# Altium PCB PCB1.PcbDoc
Units mm, origin at the board's own origin, x right, y up, seen from the top; angles counter-clockwise.
Board outline 49.91 x 61.09 mm, 2 copper layers (Top Layer, Bottom Layer); 27 components, 38 nets, 112 pads, 0 vias.
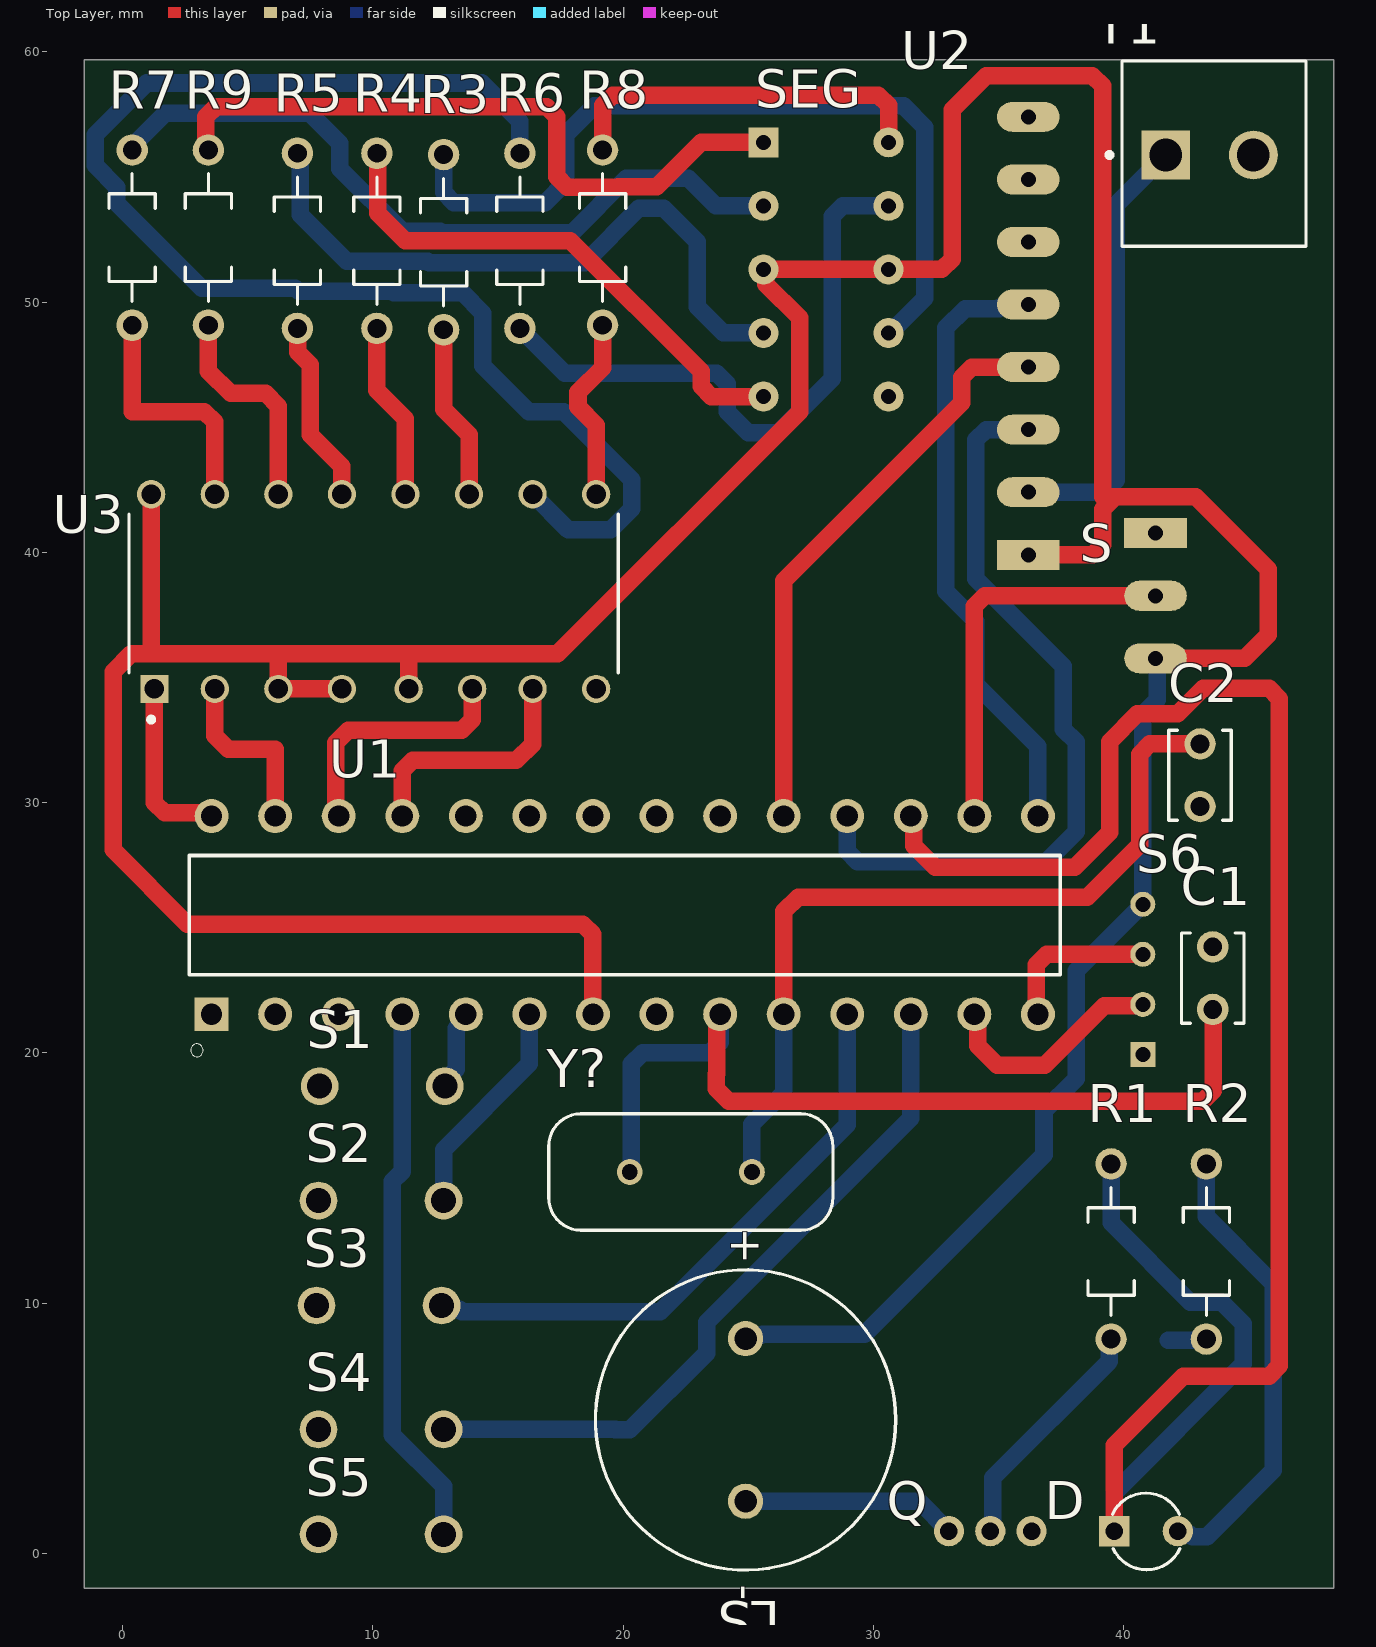
[diagram p0: Top Layer view]
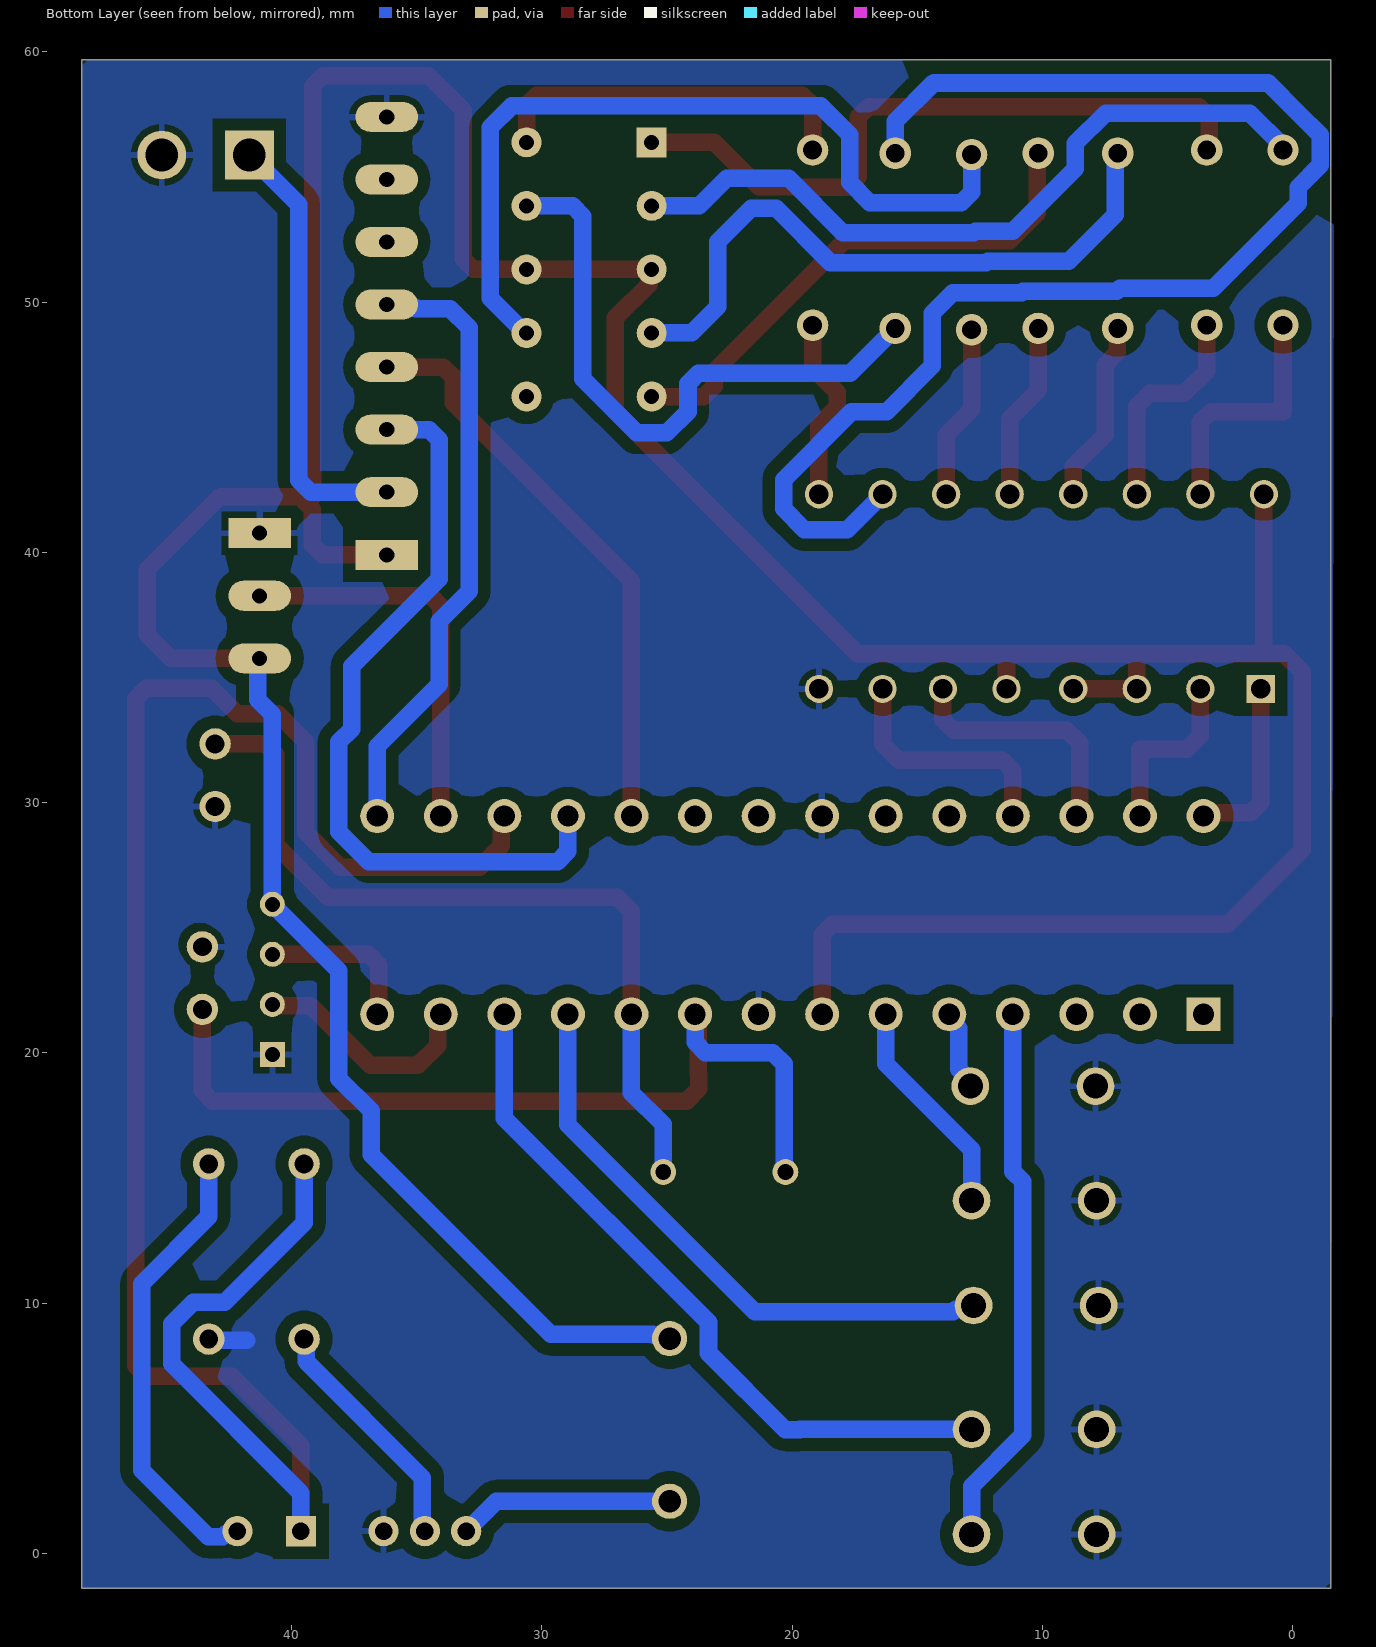
[diagram p1: Bottom Layer view, seen from below]
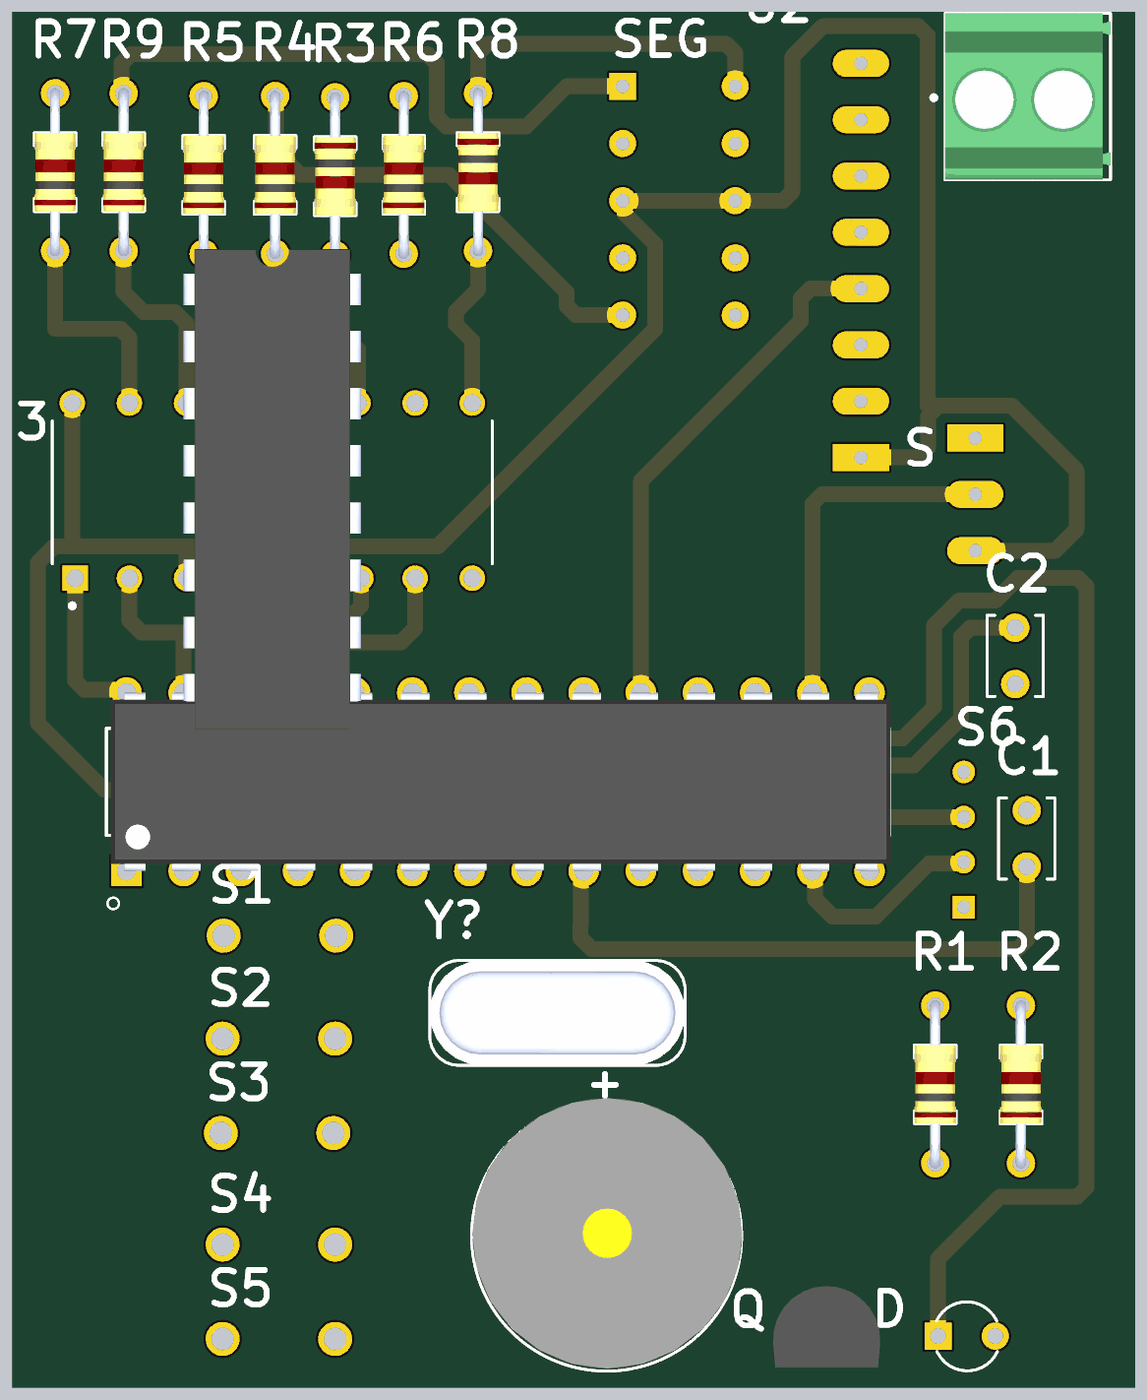
[diagram p2: 3D render of the assembled board from above, using the file's embedded part models]

## Layer stack, top to bottom
Top Solder: solder mask 0.0102, Solder Resist, Dk 3.5
Top Layer: signal copper 0.0356
Dielectric 1: dielectric 0.32, FR-4, Dk 4.8
Bottom Layer: signal copper 0.0356
Bottom Solder: solder mask 0.0102, Solder Resist, Dk 3.5

## Board outline
-1.524,-1.397 -1.524,59.69 48.387,59.69 48.387,-1.397

## Design rules (kind name [scope] priority, off if disabled: settings)
Clearance [All] p1: gap=0.5 ignorepadtopadclearanceinfootprint=FALSE
ComponentClearance [All] p1: gap=0.254 collisioncheckmode=3 verticalgap=0.1 showdistances=FALSE
PolygonConnect [All] p1: connectstyle=Relief reliefconductorwidth=0.254 reliefentries=4 polygonreliefangle="90 Angle" airgapwidth=0.254
RoutingVias [All] p1: holewidth=0.711 width=1.27 viastyle="Through Hole" minholewidth=0.711 minwidth=1.27 maxholewidth=0.711 maxwidth=1.27
SolderMaskExpansion [All] p1: expansion=0.102 istentingtop=FALSE soldermaskfromhole=TRUE
SupplyNets "Schematic Supply Nets_2" [InNet('+12')] p1: voltage=0.000
SupplyNets "Schematic Supply Nets_1" [InNet('GND')] p2: voltage=0.000
SupplyNets "Schematic Supply Nets" [InNet('+5')] p3: voltage=0.000
Width [All] p1: maxlimit=0.7 minlimit=0.7 preferedwidth=0.7
29 further rules are at their usual default settings.

## Components (designator, comment, footprint, x,y, rotation, side; value= is the part's Value field where it differs from the comment)
C1 "22pf" CAP_RCE5C2A220J0A2H03B 43.561,22.987 r270 top
C2 "22pf" CAP_RCE5C2A220J0A2H03B 43.053,31.095 r90 top
D "OVLAW4CB7" LEDRD254W50D305H520P 40.894,0.889 r0 top
LS "CEM-1206S" CUI_CEM-1206S 24.892,5.334 r270 top
Q "BC550CBU" TO92- 34.671,1.016 r0 top
R1 "1kΩ" RESAD700W45L350D185 39.497,12.065 r270 top
R2 "330Ω" RESAD700W45L350D185 43.307,12.065 r270 top
R3 "220Ω" RESAD700W45L350D185 12.827,52.395 r90 top
R4 "220Ω" RESAD700W45L350D185 10.16,52.451 r270 top
R5 "220Ω" RESAD700W45L350D185 6.985,52.451 r270 top
R6 "220Ω" RESAD700W45L350D185 15.875,52.451 r270 top
R7 "220Ω" RESAD700W45L350D185 0.381,52.578 r270 top
R8 "220Ω" RESAD700W45L350D185 19.177,52.578 r90 top
R9 "220Ω" RESAD700W45L350D185 3.429,52.578 r270 top
S "servo" DIP6 41.275,40.767 r0 top
S1 "BUTT-2" SW_BUTT-2 10.374,18.669 r180 top
S2 "BUTT-2" SW_BUTT-2 10.327,14.097 r180 top
S3 "BUTT-2" SW_BUTT-2 10.247,9.906 r180 top
S4 "BUTT-2" SW_BUTT-2 10.327,4.953 r180 top
S5 "BUTT-2" SW_BUTT-2 10.327,0.762 r180 top
S6 "ultra_sonic" DIP8 40.767,19.939 r180 top
SEG "7-SEG" 7seg 33.528,52.451 r270 top
T1 "terminal block" "2 PIN" 43.434,55.88 r0 top
U1 "ATMEGA328P-PU" DIP794W46P254L2967H457Q28B 20.066,25.504 r90 top
U2 "L298" DIP16 36.195,39.904 r180 top
U3 "7447" DIP794W45P254L1969H508Q16 10.033,38.354 r90 top
Y? "ECS-40-S-4" XTAL_ECS-40-S-4 22.706,15.24 r180 top

## Footprints (in the part's own frame and the unit in brackets; to place one, negate y for a bottom-side part, rotate by r counter-clockwise, add the part's x,y. Pads: shape width x height; smd on the part's side, far side on the other; paste and mask are expansions set on the pad)
"2 PIN" [mm]
  rect 1.95x1.95 / inner round 1.95 / far side rect 1.95x1.95 hole 1.3: 1(-1.75,0)
  round 1.95 hole 1.3: 2(1.75,0)
  silkscreen extent -4.1,-3.65 3.85,3.75, body extent -3.51,-3.63 3.86,3.76, height 8.51
7seg [mm]
  rect 1.2x1.2 hole 0.6: 1(-3.937,-7.921)
  round 1.2 hole 0.6: 2(-1.397,-7.921) 3(1.143,-7.921) 4(3.683,-7.921) 5(6.223,-7.921) 6(6.223,-2.921) 7(3.683,-2.921) 8(1.143,-2.921) 9(-1.397,-2.921) 10(-3.937,-2.921)
CAP_RCE5C2A220J0A2H03B [mm]
  round 1.258 hole 0.75: 1(-1.25,0) 2(1.25,0)
  silkscreen extent -1.8,-1.25 1.8,1.25
CUI_CEM-1206S [mm]
  round 1.408 hole 0.9: N(3.25,0) P(-3.25,0)
  silkscreen extent -6,-6 6,6, body extent -6.12,-5.97 5.87,6.03, height 9.5
DIP6 [mm]
  rect 2.5x1.2 hole 0.6: 1(0,0)
  oval 2.5x1.2 hole 0.6: 2(0,-2.5) 3(0,-5)
DIP8 [mm]
  rect 1x1 hole 0.6: 1(0,0)
  round 1 hole 0.6: 2(0,-2) 3(0,-4) 4(0,-6)
DIP16 [mm]
  rect 2.5x1.2 hole 0.6: 1(0,0)
  oval 2.5x1.2 hole 0.6: 2(0,-2.5) 3(0,-5) 4(0,-7.5) 5(0,-10) 6(0,-12.5) 7(0,-15) 8(0,-17.5)
DIP794W45P254L1969H508Q16 [mm]
  rect 1.13x1.13 hole 0.78: 1(-3.81,8.763)
  round 1.13 hole 0.78: 2(-3.81,6.35) 3(-3.81,3.81) 4(-3.81,1.27) 5(-3.81,-1.397) 6(-3.81,-3.937) 7(-3.81,-6.35) 8(-3.81,-8.89) 9(3.97,-8.89) 10(3.97,-6.35) 11(3.97,-3.81) 12(3.97,-1.27) 13(3.97,1.27) 14(3.97,3.81) 15(3.97,6.35) 16(3.97,8.89)
  silkscreen extent -5.13,-9.77 3.18,9.77, body extent -3.82,-10.67 4.08,10.67, height 5.08
DIP794W46P254L2967H457Q28B [mm]
  rect 1.358x1.358 hole 0.85: 1(-3.96,16.51)
  round 1.358 hole 0.85: 2(-3.96,13.97) 3(-3.96,11.43) 4(-3.96,8.89) 5(-3.96,6.35) 6(-3.96,3.81) 7(-3.96,1.27) 8(-3.96,-1.27) 9(-3.96,-3.81) 10(-3.96,-6.35) 11(-3.96,-8.89) 12(-3.96,-11.43) 13(-3.96,-13.97) 14(-3.96,-16.51) 15(3.96,-16.51) 16(3.96,-13.97) 17(3.96,-11.43) 18(3.96,-8.89) 19(3.96,-6.35) 20(3.96,-3.81) 21(3.96,-1.27) 22(3.96,1.27) 23(3.96,3.81) 24(3.96,6.35) 25(3.96,8.89) 26(3.96,11.43) 27(3.96,13.97) 28(3.96,16.51)
  silkscreen extent -5.65,-17.4 2.38,17.4, body extent -3.95,-17.46 3.95,17.21, height 4.57
LEDRD254W50D305H520P [mm]
  rect 1.208x1.208 hole 0.7: A(-1.27,0)
  round 1.208 hole 0.7: C(1.27,0)
  silkscreen extent -1.34,-1.54 1.36,1.52
RESAD700W45L350D185 [mm]
  round 1.258 hole 0.75: 1(-3.5,0) 2(3.5,0)
  silkscreen extent -2.55,-0.93 2.55,0.93, body extent -3.72,-0.92 3.72,0.92, height 1.85
SW_BUTT-2 [mm]
  round 1.508 hole 1: 1(-2.5,0) 2(2.5,0)
TO92- [mil]
  round 47.56 hole 27.56: 1(65,-5) 2(0,-5) 3(-65,-5)
  body extent -93,-60 93,83, height 210
XTAL_ECS-40-S-4 [mm]
  round 1.03 hole 0.63: 1(-2.44,0) 2(2.44,0)
  silkscreen extent -5.68,-2.33 5.68,2.33, body extent -5.68,-2.32 5.68,2.32, height 3.5

## Part data
C1 C2: library part RCE5C2A220J0A2H03B, "Cap Ceramic 1pF 50V C0G 0.25pF Radial 2.5mm 125C Automotive Bulk", Package=None, Availability=Unavailable, MP=RCE5C2A220J0A2H03B, Price=None
D: "White LED Indication - Discrete 3.2V Radial", Package="Radial Optek", Availability=Unavailable, MF="TT Electronics/Optek", MP=OVLAW4CB7, Price=None, SnapEDA_Link=https://www.snapeda.com/parts/OVLAW4CB7/TT%20Electronics/Optek%20Technology/view-part/328075/?ref=snap
LS: "12 mm, 5 V, 85 dB, Through Hole, Sealed, Magnetic Audio Transducer Buzzer", Package=TO-220, Availability=Unavailable, MF="CUI Devices", MP=CEM-1206S, Price=None, SnapEDA_Link=https://www.snapeda.com/parts/CEM-1206S/CUI%20Devices/view-part/590537/?ref=snap
Q: "Bipolar _BJT_ Transistor NPN 45V 100mA 300MHz 500mW Through Hole TO-92-3", Package="TO-92 ON Semiconductor", Availability=Unavailable, MF="ON Semiconductor", MP=BC550CBU, Price=None, SnapEDA_Link=https://www.snapeda.com/parts/BC550CBU/ON%20Semiconductor/view-part/1852525/?ref=snap
R1 R2 R3 R4 R5 R6 R7 R8 R9: library part 3-1623927-1, "1 MOhms Â±5% 0.25W, 1/4W Through Hole Resistor Axial - Carbon Film", Package=None, Availability="In Stock", Check_prices=https://www.snapeda.com/parts/3-1623927-1/TE+Connectivity/view-part/?ref=eda, MF="TE Connectivity", MP=3-1623927-1, Price=None, SnapEDA_Link=https://www.snapeda.com/parts/3-1623927-1/TE+Connectivity/view-part/?ref=snap
S1 S2 S3 S4 S5: "Tactile Switches MINI PUSH BUTTON SWITCH 2-PIN QTY. 4", Package=None, Availability="In Stock", Check_prices=https://www.snapeda.com/parts/BUTT-2/Gravitech/view-part/?ref=eda, MF=Gravitech, MP=BUTT-2, Price=None, Purchase-URL=https://pricing.snapeda.com/search/part/BUTT-2/?ref=eda, SnapEDA_Link=https://www.snapeda.com/parts/BUTT-2/Gravitech/view-part/?ref=snap
U1: "ATmega Series 20 MHz 32 KB Flash 2 KB SRAM 8-Bit Microcontroller - DIP-28", Package=None, Availability=Unavailable, MP=ATMEGA328P-PU, Price=None
U3: Package=None, Availability=Unavailable, MP=CD4511BE, Price=None
Y?: "Crystal 4MHz Â±30ppm (Tol) Â±50ppm (Stability) Series FUND 150Ohm 2-Pin HC-49/USX Thru-Hole Bulk", Package="HC-49US ECS Inc.", Availability="In Stock", Check_prices=https://www.snapeda.com/parts/ECS-40-S-4/ECS+Inc./view-part/?ref=eda, MF="ECS Inc.", MP=ECS-40-S-4, Price=None, Purchase-URL=https://pricing.snapeda.com/search/part/ECS-40-S-4/?ref=eda, SnapEDA_Link=https://www.snapeda.com/parts/ECS-40-S-4/ECS+Inc./view-part/?ref=snap

## Nets (pads, with @x,y where several pads share a name; then routed paths per layer and width w, separated by ;. In a path a pad name is that pad's centre, name@x,y a point inside that pad or via, vN(x,y) a via of type N, cw(c..) or ccw(c..) an arc to the next point about the centre after c; other vN are vias at no path point)
+5: LS.P S6.4 S.3 SEG.3 SEG.8 U1.7 U2.1 U3.3 U3.4 U3.5 U3.16 | length 176.3
  Top Layer w0.7: U3.16 1.143,35.959 ; U3.4 U3.3 6.223,35.959 ; U3.5 11.43,35.959 ; U1.7 18.796,24.736 18.386,25.146 2.583,25.146 -0.381,28.11 -0.381,35.225 0.353,35.959 1.143,35.959 ; U2.1 38.765,39.904 39.175,40.314 39.175,41.719 39.673,42.217 ; S.3 44.835,35.767 45.773,36.705 45.773,39.321 42.877,42.217 39.673,42.217 ; 1.143,35.959 6.223,35.959 ; 6.223,35.959 11.43,35.959 ; 11.43,35.959 17.389,35.959 27.057,45.627 27.057,49.369 25.703,50.723 25.703,51.212 SEG.3 SEG.8 32.737,51.308 33.147,51.718 33.147,57.692 34.51,59.055 38.748,59.055 39.158,58.645 39.158,42.217 39.673,42.217
  Bottom Layer w0.7: LS.P 25.027,8.719 25.528,8.719 25.572,8.763 29.646,8.763 36.818,15.935 36.818,17.687 38.105,18.974 38.105,23.277 S6.4 40.767,33.54 41.344,34.117 41.344,35.698 S.3 40.76,35.767 S.3@40.529,35.998 ; U2.1 U2.1@36.845,39.904
+12: T1.1 U2.2 | length 17.5
  Bottom Layer w0.7: U2.2 39.229,42.404 39.706,42.881 39.706,53.902 T1.1
A: R5.2 U3.13 | length 7.4
  Top Layer w0.7: R5.2 7,48.936 7,47.991 7.493,47.498 7.493,44.704 8.763,43.434 U3.13
B: R4.2 U3.12 | length 7.1
  Top Layer w0.7: R4.2 10.16,46.482 11.303,45.339 U3.12
C: R3.1 U3.11 | length 7
  Top Layer w0.7: R3.1 12.827,45.72 13.843,44.704 U3.11
D: R6.1 U3.10 | length 55.3
  Bottom Layer w0.7: R6.1 15.875,57.229 14.347,58.757 0.972,58.757 -0.228,57.557 -0.232,57.557 -1.098,56.691 -1.098,55.465 -0.232,54.599 -0.232,53.953 3.164,50.557 6.905,50.557 7.032,50.43 10.773,50.43 10.828,50.375 13.585,50.375 14.396,49.564 14.396,47.449 16.221,45.624 17.624,45.624 20.338,42.91 20.338,41.738 19.509,40.909 17.798,40.909 U3.10
E: R8.1 U3.9 | length 7.5
  Top Layer w0.7: U3.9 18.923,45.085 18.197,45.811 18.197,46.391 19.177,47.371 R8.1
ECHO: S6.2 U1.13 | length 9.2
  Top Layer w0.7: U1.13 34.162,21.418 34.162,20.293 34.947,19.507 36.854,19.507 39.228,21.882 40.71,21.882 S6.2
EN: U1.15 U2.5 | length 24.7
  Bottom Layer w0.7: U2.5 36.099,49.808 35.096,49.808 35.028,49.741 33.667,49.741 32.901,48.974 32.901,48.603 32.895,48.597 32.895,38.455 34.095,37.255 34.095,34.739 36.576,32.258 U1.15
F: R7.2 U3.15 | length 9.8
  Top Layer w0.7: R7.2 0.381,45.626 3.269,45.626 3.683,45.212 U3.15
F0: S1.1 U1.5 | length 3.2
  Bottom Layer w0.7: S1.1 12.874,18.888 13.335,19.349 13.335,20.985 13.716,21.366 U1.5
F1: S2.1 U1.6 | length 8.9
  Bottom Layer w0.7: S2.1 12.827,16.129 16.256,19.558 U1.6
F2: S3.1 U1.11 | length 23.8
  Bottom Layer w0.7: S3.1 12.902,9.751 13.462,9.751 13.561,9.652 21.488,9.652 28.956,17.12 U1.11
F3: S4.1 U1.12 | length 28.7
  Bottom Layer w0.7: S4.1 19.685,4.953 19.694,4.944 20.274,4.944 23.338,8.007 23.338,9.228 31.496,17.386 U1.12
G: R9.2 U3.14 | length 8.7
  Top Layer w0.7: R9.2 3.429,47.244 4.318,46.355 5.715,46.355 6.223,45.847 U3.14
GND: C1.1 C2.1 Q.1 R2.2 S1.2 S2.2 S3.2 S4.2 S5.2 S6.1 S.1 T1.2 U1.8 U1.22 U2.8 U3.8 | length 1.7
  Bottom Layer w0.7: 41.783,8.509 43.251,8.509 R2.2 ; C1.1 C1.1@43.668,24.344
IN1: U1.18 U2.3 | length 30.8
  Bottom Layer w0.7: U1.18 28.956,28.051 29.366,27.641 36.915,27.641 38.105,28.831 38.105,32.426 37.592,32.939 37.592,35.455 34.095,38.952 34.095,44.494 34.505,44.904 U2.3
IN2: U1.19 U2.4 | length 23.3
  Top Layer w0.7: U1.19 26.416,38.862 33.528,45.974 33.528,46.994 33.938,47.404 U2.4
INTERRUPT: S5.1 U1.4 | length 21.8
  Bottom Layer w0.7: U1.4 11.176,15.261 10.781,14.865 10.781,4.731 12.827,2.685 S5.1
"interrupt action": D.A R1.1 U1.17 | length 79.2
  Top Layer w0.7: U1.17 31.622,29.338 31.622,28.279 32.474,27.427 38.049,27.427 39.44,28.818 39.44,32.432 40.553,33.545 42.161,33.545 43.183,34.567 45.818,34.567 46.228,34.157 46.228,7.496 45.818,7.086 42.392,7.086 39.624,4.318 D.A
  Bottom Layer w0.7: R1.1 39.497,13.208 42.661,10.044 43.92,10.044 44.786,9.178 44.786,7.575 39.624,2.413 D.A
NetC1_2: C1.2 U1.9 Y?.2 | length 35.9
  Top Layer w0.7: U1.9 23.75,21.418 23.75,19.162 23.73,19.141 23.73,18.561 24.217,18.074 43.162,18.074 43.572,18.484 43.572,21.726 C1.2
  Bottom Layer w0.7: Y?.2 20.319,15.293 20.319,19.557 20.777,20.015 23.466,20.015 23.876,20.425 U1.9
NetC2_2: C2.2 U1.10 Y?.1 | length 32.5
  Top Layer w0.7: U1.10@26.416,21.557 26.416,25.654 26.989,26.227 38.546,26.227 40.64,28.321 40.64,31.935 41.05,32.345 C2.2
  Bottom Layer w0.7: Y?.1 25.146,17.145 26.416,18.415 U1.10
NetD_C: D.C R2.1 | length 18.4
  Bottom Layer w0.7: D.C 42.261,0.792 42.62,0.792 42.752,0.66 43.332,0.66 45.986,3.314 45.986,10.783 43.307,13.462 R2.1
NetLS_N: LS.N Q.3 | length 8.6
  Bottom Layer w0.7: LS.N 31.825,2.084 Q.3
NetQ_2: Q.2 R1.2 | length 9.7
  Bottom Layer w0.7: Q.2 34.768,0.986 34.768,3.018 39.419,7.669 39.419,8.487 R1.2
NetR3_2: R3.2 SEG.7 | length 32.8
  Bottom Layer w0.7: R3.2 12.827,54.385 13.237,53.975 16.891,53.975 17.698,54.782 17.698,56.691 18.845,57.838 29.955,57.838 31.208,57.838 32.057,56.989 32.057,50.146 30.679,48.768 SEG.7
NetR4_1: R4.1 SEG.5 | length 21.2
  Top Layer w0.7: R4.1 10.203,55.908 10.203,53.551 11.303,52.451 17.896,52.451 23.114,47.233 23.114,46.638 23.524,46.228 SEG.5
NetR5_1: R5.1 SEG.4 | length 26.4
  Top Layer w0.7: SEG.4@25.536,48.84 SEG.4
  Bottom Layer w0.7: R5.1 7.092,55.844 7.092,53.487 8.949,51.63 12.188,51.63 12.243,51.575 18.463,51.575 20.631,53.744 21.625,53.744 22.96,52.409 22.96,49.811 24.003,48.768 SEG.4
NetR6_2: R6.2 SEG.9 | length 24.7
  Bottom Layer w0.7: R6.2 17.668,47.158 23.747,47.158 24.157,46.748 24.157,45.627 25.006,44.778 26.208,44.778 28.359,46.93 28.359,53.438 28.77,53.848 SEG.9
NetR7_1: R7.1 SEG.2 | length 29.9
  Bottom Layer w0.7: R7.1 0.381,56.229 1.709,57.557 7.471,57.557 8.681,56.347 8.681,55.338 11.189,52.83 12.685,52.83 12.74,52.775 17.966,52.775 20.134,54.944 22.606,54.944 23.702,53.848 SEG.2
NetR8_2: R8.2 SEG.10 | length 15
  Top Layer w0.7: R8.2 19.177,57.862 19.587,58.272 30.197,58.272 30.607,57.862 SEG.10
NetR9_1: R9.1 SEG.1 | length 27.3
  Top Layer w0.7: R9.1 3.322,56.185 3.322,57.402 3.732,57.812 16.944,57.812 17.354,57.402 17.354,55.02 17.775,54.599 19.79,54.599 19.801,54.61 21.336,54.61 23.114,56.388 SEG.1
SEG-A: U1.28 U3.1 | length 7.1
  Top Layer w0.7: U3.1 1.27,30 1.68,29.59 3.43,29.59 U1.28
SEG-B: U1.27 U3.2 | length 7.2
  Top Layer w0.7: U3.2 3.683,32.668 4.22,32.131 6.096,32.131 U1.27
SEG-C: U1.26 U3.6 | length 10.1
  Top Layer w0.7: U1.26 8.51,29.59 8.51,32.386 9.017,32.893 13.56,32.893 13.97,33.303 U3.6
SEG-D: U1.25 U3.7 | length 9.7
  Top Layer w0.7: U1.25 11.176,31.283 11.586,31.693 15.737,31.693 16.383,32.339 U3.7
Servo: S.2 U1.16 | length 15.8
  Top Layer w0.7: U1.16@34.036,29.477 34.036,37.857 34.446,38.267 S.2
TRIG: S6.3 U1.14 | length 6.4
  Top Layer w0.7: U1.14 36.509,21.611 36.509,23.529 36.919,23.939 S6.3
pads on no net: SEG.6 U1.1 U1.2 U1.3 U1.20 U1.21 U1.23 U1.24 U2.6 U2.7

## Polygon pours and split planes (outlines as drawn)
GND on Bottom Layer "GND_L02_P000" (solid, remove dead copper, pour order 0): -1.651,59.69 48.133,59.69 48.387,59.436 48.387,-1.397 -1.27,-1.397 -1.524,-1.143

## Keep-outs
Keep-Out Layer:
  lines w0.254: 130.556,0.889 ccw(c130.556,2.159) 131.826,2.159

## Text inside footprints (layer, text, board x,y; h text height)
LS: Top Overlay "+" at 24.32,13.004 h1.28 r270; Top Overlay "-" at 24.321,-1.259 h1.27 r270